# Altium PCB miaow-foc-board.pcbdoc (part 7 of 10)
Units mil, origin at the board's own origin, x right, y up, seen from the top; angles counter-clockwise.
Board outline 2755.91 x 3149.61 mil, 6 copper layers (SIG1, GND2, SIG3, PWR4, GND5, SIG6), stack 60.566 mil thick; 437 components, 392 nets, 2120 pads, 1697 vias.
Unrouted connection lines stored in the file: 1090.
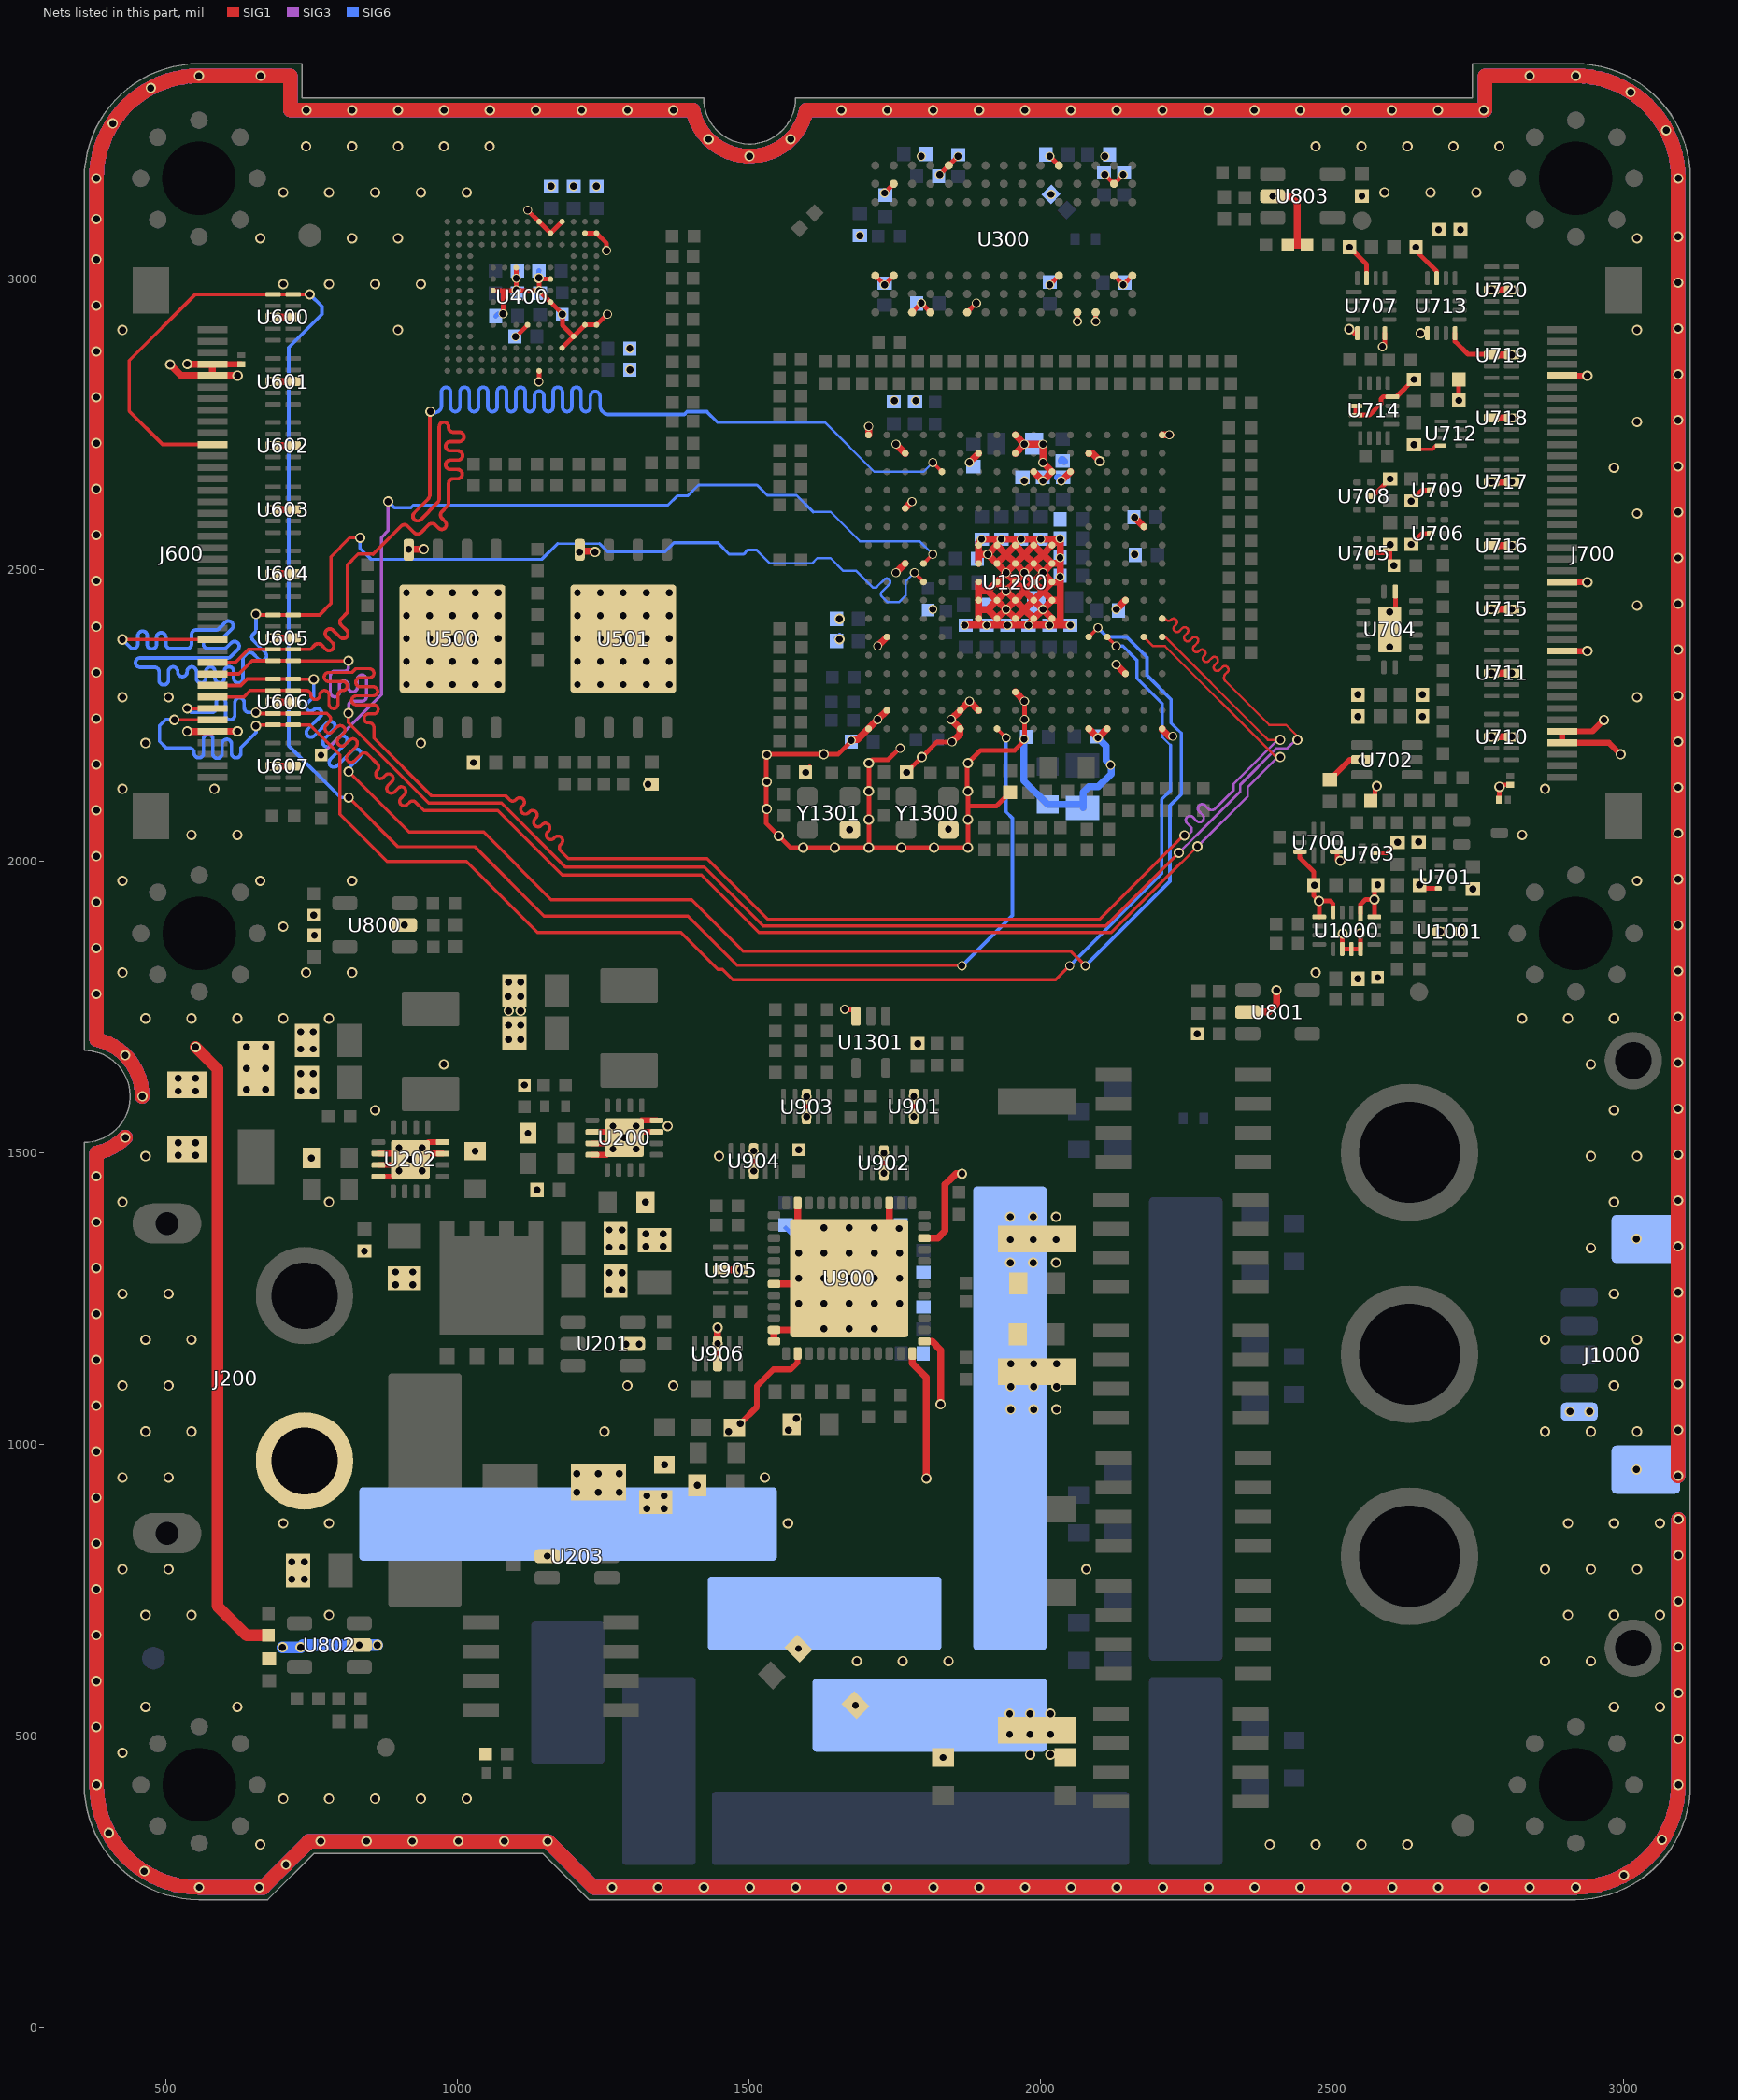
[diagram p10: the nets of this part, all layers, seen from the top]

## Via types
v1: diameter 17.72, hole 11.81, SIG1 to SIG6, tented both sides, 1223 vias
v2: diameter 15.75, hole 11.81, SIG1 to SIG6, tented both sides, 453 vias
v3: diameter 17.72, hole 11.81, SIG1 to SIG6, tented top, 21 vias

## Nets (pads, with @x,y where several pads share a name; then routed paths per layer and width w, separated by ;. In a path a pad name is that pad's centre, name@x,y a point inside that pad or via, vN(x,y) a via of type N, cw(c..) or ccw(c..) an arc to the next point about the centre after c; other vN are vias at no path point) (continued)
GDRVA: C200.1 C201.1 C202.1 C203.1 C204.1 C205.1 C206.1 C210.1 C211.1 C213.1 C214.1 C215.1 C300.1 C301.1 C302.1 C303.1 C304.1 C305.1 C306.1 C307.1 C308.1 C309.1 C310.1 C311.1 C312.1 C313.1 C400.1 C401.1 C402.1 C403.1 C404.1 C405.1 C406.1 C407.1 C408.1 C409.1 C410.1 C500.1 C501.1 C700.2 C701.1 C702.1 C703.2 C704.1 C705.2 C706.1 C707.2 C708.2 C709.2 C710.1 C711.2 C712.1 C713.1 C714.2 C715.1 C716.1 C717.2 C718.2 C719.1 C720.1 C721.2 C802.1 C803.1 C806.1 C807.1 C902.1 C907.2 C1000.1 C1001.2 C1200.1 C1201.1 C1202.1 C1203.1 C1204.1 C1205.1 C1206.1 C1207.1 C1208.1 C1209.1 C1210.1 C1211.1 C1212.1 C1213.1 C1214.1 C1215.1 C1216.1 C1217.1 C1218.1 C1219.1 C1220.1 C1221.1 C1222.1 C1223.1 C1224.1 C1225.1 C1226.1 C1227.1 C1228.1 C1229.1 C1230.1 C1231.1 C1232.1 C1233.1 C1300.2 C1301.2 C1303.2 C1304.2 C1305.2 D201.1 D600.2 D700.1 D701.2 J600.4 J600.5 J600.36 J700.4 J700.5 J700.12 J700.18 J700.36 J1000.5 J1000.PAD R202.2 R203.1 R206.1 R419.1 R712.2 R804.1 R805.1 R806.1 R807.1 R812.1 R813.1 R814.1 R815.1 R905.1 R1385.1 U200.6 U200.7 U200.8 U200.15 U200.16 U200.17 U201.2 U202.6 U202.7 U202.8 U202.15 U202.16 U202.17 U300.A3 U300.B3 U300.B8 U300.C1 U300.D1 U300.E9 U300.F1 U300.L3 U300.L9 U300.M1 U300.N1 U300.P3 U300.P8 U300.R3 U400.A6 U400.C4 U400.D3 U400.E1 U400.E2 U400.E7 U400.G5 U400.H10 U400.J5 U400.K8 U400.N1 U400.N2 U400.N5 U400.P4 U400.P6 U500.4 U500.9 U501.4 U501.9 U600.3 U600.8 U601.3 U601.8 U602.3 U602.8 U603.3 U603.8 U604.3 U604.8 U605.3 U605.8 U606.3 U606.8 U607.3 U607.8 U700.3 U700.10 U701.3 U702.2 U703.2 U704.8 U704.17 U705.2 U706.2 U707.5 U707.8 U707.15 U708.2 U709.2 U710.3 U710.8 U711.3 U711.8 U712.4 U713.5 U713.8 U713.15 U714.4 U714.10 U714.11 U715.3 U715.8 U716.3 U716.8 U717.3 U717.8 U718.3 U718.8 U719.3 U719.8 U720.3 U720.8 U800.2 U801.2 U802.2 U803.2 U900.27 U900.35 U900.43 U900.47 U900.48 U900.49 U901.3 U901.8 U902.3 U902.8 U903.3 U903.8 U904.3 U904.8 U905.3 U905.8 U906.3 U906.8 U1000.1 U1000.4 U1000.5 U1000.10 U1000.11 U1000.12 U1000.16 U1001.3 U1001.8 U1200.A1 U1200.A17 U1200.B2 U1200.B6 U1200.C10 U1200.C13 U1200.C16 U1200.F1 U1200.F2 U1200.G2 U1200.G7 U1200.G8 U1200.G9 U1200.G10 U1200.G11 U1200.G16 U1200.H7 U1200.H8 U1200.H9 U1200.H10 U1200.H11 U1200.J3 U1200.J7 U1200.J8 U1200.J9 U1200.J10 U1200.J11 U1200.J16 U1200.J17 U1200.K7 U1200.K8 U1200.K9 U1200.K10 U1200.K11 U1200.K15 U1200.L7 U1200.L8 U1200.L9 U1200.L10 U1200.L11 U1200.L15 U1200.M15 U1200.N1 U1200.N16 U1200.P1 U1200.R4 U1200.R8 U1200.T12 U1200.U1 U1200.U17 U1301.3 Y1300.2 Y1301.2 | length 31073.7
  SIG1 w6: J600.5@579.13,2833.8 J600.5@579.29,2833.64 ; J600.4@579.13,2853.47 J600.4@579.54,2853.06 ; U703.2@2573.99,2014.11 2594.16,2014.11 v1(2612.96,2032.9) ; C721.2@2641.04,2717.04 2641.04,2712.2 2646.17,2707.06 2672.12,2707.06 2678.56,2713.5 U712.4@2686.6,2713.5
  SIG1 w8: U400.H10@1061.14,2979.62 1078.08,2979.62 ; v2(1078.08,2939.59) 1078.08,2979.62 ; v2@1100.15,2900.51 U400.E7@1120.19,2920.56 ; U400.K8@1100.51,3018.99 1100.51,2980.5 v2(1100.68,2980.33) ; v2(1120.45,3117.57) 1120.45,3117.15 U400.P6@1139.88,3097.73 U400.N5@1159.56,3078.04 U400.P4@1179.25,3097.73 ; v2(1139.35,2823.12) 1139.88,2823.64 U400.A6@1139.88,2841.82 ; U400.J5@1159.56,2999.3 1144.98,2999.3 1141.35,3002.93 1139.55,3002.93 1139.93,3002.55 1139.93,2979.38 v2(1139.86,2979.32) ; U400.C4@1179.25,2881.19 U400.D3@1198.93,2900.87 ; U400.N2@1218.62,3078.04 U400.N1@1238.3,3078.04 1255.65,3060.7 v2(1255.65,3048.1) ; v2(1257.23,2938.88) 1256.62,2938.88 U400.E1@1238.3,2920.56 U400.E2@1218.62,2920.56 U400.D3@1198.93,2900.87 ; v1@1529.68,2085.27 v1@1529.68,2183.78 ; v1@1529.9,2085.27 1529.9,2065.27 v1(1551.01,2044.16) 1571.7,2023.47 v1@1704.23,2023.47 ; v1@1535.34,2183.78 v1(1628.42,2183.78) 1652.69,2183.78 v2@1673.7,2204.79 ; v1(1597.08,2152.88) 1604.5,2160.3 C1304.2@1604.5,2162.19 ; v2(1664.33,1746.51) 1664.33,1745.67 U1301.3@1680.15,1745.67 ; U300.A3@1716.9,3005.21 v2(1732.65,2989.46) U300.B3@1748.4,3005.21 ; v2(1732.65,3146.94) U300.B8@1748.4,3162.69 ; v2@1758.57,2194.39 1738.95,2174.77 1711.52,2174.77 v1(1705.58,2168.83) v1(1705.58,2120.52) v1(1705.58,2072.21) v1(1705.58,2023.91) v1(1761.58,2023.91) v1(1817.59,2023.91) v1@1874.02,2023.91 ; C1303.2@1778.62,2161.09 v1(1796.69,2179.15) 1822.79,2205.25 v2(1848.48,2205.25) ; U300.C1@1779.9,2942.21 v2(1795.64,2957.96) U300.D1@1811.39,2942.21 ; v2(1827.14,3178.43) U300.E9@1842.89,3194.18 v2(1858.64,3209.93) ; v1@1874.02,2121.19 v1@1874.02,2168.83 ; U300.F1@1874.38,2941.92 U300.F1@1874.38,2942.21 v2(1890.13,2957.96) ; v1(1875.6,2023.91) v1(1875.6,2072.21) 1875.6,2095.01 ; v1(1875.6,2120.52) 1875.6,2095.01 ; v1(1875.6,2168.83) 1897.63,2190.86 1955.86,2190.86 v2@1975.02,2210.02 ; C1300.2@1948.14,2118.7 1924.45,2095.01 1875.6,2095.01 ; v2@1972.81,2214.86 v2(1972.81,2243.6) v2(1972.81,2275.1) ; v2(2016.12,2989.46) U300.L3@2031.86,3005.21 ; v2(2016.12,3209.93) U300.L9@2031.86,3194.18 ; v2@2062.53,2924.18 2063.36,2925.01 U300.M1@2063.36,2942.21 ; v2@2094.86,2925.01 U300.N1@2094.86,2942.21 ; v2(2110.6,3178.43) U300.P8@2126.35,3162.69 v2(2142.1,3178.43) ; U300.P3@2126.35,3005.21 v2(2142.1,2989.46) U300.R3@2157.85,3005.21 ; v2@2221.95,2214.93 v2(2227.31,2214.93) ; U700.10@2445.45,2016.87 2445.45,2006.12 2469.36,1982.21 2469.36,1940.93 v1@2478.65,1931.64 ; U1000.5@2478.65,1905.07 v1@2478.65,1931.64 ; U1000.4@2502.28,1912.94 2502.28,1927.41 2497.4,1932.29 2479.31,1932.29 v1@2478.65,1931.64 ; U700.3@2508.45,2016.87 2509.24,2016.87 2509.3,2016.8 2509.3,2002.4 2510.32,2001.37 v1(2514.65,2001.37) ; v1(2518.91,1876.56) 2518.02,1875.67 U1000.10@2518.02,1849.95 U1000.11@2533.77,1849.95 U1000.12@2549.52,1849.95 2549.52,1873.67 2550.46,1874.61 v1(2548.57,1876.51) ; v1(2529.74,2913.28) 2530.58,2914.11 2538.3,2906.39 U707.5@2543.95,2906.39 ; v1(2530.44,3053.93) 2559.7,3024.67 U707.15@2559.7,3000.88 ; U714.10@2541,2781.56 U714.11@2541,2765.81 2557.98,2765.81 2558.07,2765.9 2564.51,2765.9 2584.25,2785.64 2584.25,2787.3 2584.37,2787.41 2584.37,2793.45 2588.22,2797.3 U714.4@2604,2797.3 2611.2,2797.3 C720.1@2642.04,2828.14 ; U1000.1@2549.52,1910.97 2549.52,1926.44 2557.8,1934.72 v1(2573.14,1934.72) ; C700.2@2567.03,2103.81 2574.04,2110.81 2574.04,2126.12 v1(2577.36,2129.44) ; U708.2@2567.26,2628.79 2572.71,2628.79 v1(2600.16,2656.24) ; U705.2@2568.26,2529.33 2600.16,2529.33 ; U1000.16@2573.14,1905.07 v1(2573.14,1934.72) ; v1(2578.95,1959.8) 2573.14,1953.99 v1(2573.14,1934.72) ; v2@2586.27,2883.81 2586.97,2883.11 2591.2,2887.34 U707.8@2591.2,2906.39 ; U704.17@2599.28,2398.25 2609.12,2408.09 U704.8@2609.12,2463.21 ; v1(2600.16,2543.71) 2600.16,2514.17 v1(2606.83,2507.49) ; v1(2636.61,2544.08) 2655.12,2562.59 U706.2@2669.81,2562.59 ; v1(2636.61,2618.44) 2655.29,2637.12 U709.2@2669.81,2637.12 ; C715.1@2637.58,3048.93 C715.1@2645.07,3048.93 ; v1(2644.58,3053.93) 2644.58,3048 2680,3012.58 U713.15@2680,2995.62 ; v1(2650.74,1959.8) 2656.79,1953.75 U701.3@2682.84,1953.75 ; v1(2652.56,2906.32) 2652.63,2906.39 2655.16,2906.39 U713.5@2664.25,2906.39 ; U713.8@2711.49,2906.39 2711.49,2892.39 2733.62,2870.26 U719.8@2774.38,2870.26 ; C717.2@2718.04,2826.98 2718.04,2791.64 C716.1@2718.56,2791.12 ; D701.2@2785.52,2106.15 2787.12,2107.76 2787.12,2127.45 2789.65,2127.45 2793.82,2131.62 D700.1@2806.2,2131.62 ; 1078.08,2979.62 1107.42,2979.62 1108.14,2980.33 1109.15,2979.32 v2(1139.86,2979.32) ; v2(1139.86,2979.32) 1159.25,2959.93 U400.G5@1159.56,2959.93 1179.67,2939.83 1179.67,2920.14 U400.D3@1198.93,2900.87
  SIG1 w10: J600.4@579.54,2853.06 D600.2@628.59,2853.06 ; U202.8@864.06,1459.58 U202.17@889.65,1459.58 ; U202.7@864.06,1479.27 U202.17@888.49,1479.27 ; U202.6@864.06,1498.95 U202.17@888.85,1498.95 ; U202.17@949.84,1518.64 U202.16@974.29,1518.64 ; U202.17@949.91,1498.95 U202.15@974.29,1498.95 ; U200.8@1231.23,1496.8 U200.17@1255.81,1496.8 ; U200.7@1231.23,1516.48 U200.17@1255.59,1516.48 ; U200.6@1231.23,1536.17 U200.17@1255.42,1536.17 ; U200.17@1315.88,1555.85 U200.16@1341.47,1555.85 ; U200.17@1317.19,1536.17 U200.15@1341.47,1536.17 ; C701.1@2496.86,2140.5 2530.74,2174.38 v1(2551.36,2174.38) ; J700.12@2895.49,2361.06 v1(2938.59,2361.05) ; J700.18@2895.49,2479.17 v1(2938.59,2479.16) ; J700.36@2895.49,2833.5 v1(2938.59,2833.49) ; v1(2967.06,2242.94) 2947.53,2223.4 J700.5@2895.33,2223.4 J700.4@2895.33,2203.72 2975.69,2203.72 v1(2995.53,2183.88)
  SIG1 w12: v1(506.91,2852.67) 525.79,2833.78 579.13,2833.78 579.13,2853.47 v1(536.03,2853.48) ; v1(536.03,2223.25) J600.36@579.13,2223.26 ; J600.36@579.29,2223.4 v1(622.45,2223.38) ; J600.5@579.29,2833.64 v1(622.45,2833.62) ; U607.3@683.32,2163.73 U607.8@717.77,2163.73 ; U606.3@683.32,2273.73 U606.8@717.77,2273.73 ; U605.3@683.32,2383.73 U605.8@717.77,2383.73 ; U604.3@683.32,2493.73 U604.8@717.77,2493.73 ; U603.3@683.32,2603.73 U603.8@717.77,2603.73 ; U602.3@683.32,2713.73 U602.8@717.77,2713.73 ; U601.3@683.32,2823.73 U601.8@717.77,2823.73 ; U600.8@683.32,2933.73 U600.3@717.77,2933.73 ; v1(916.36,2535.83) v1(942.18,2535.83) ; U501.4@1209.36,2534.7 U501.4@1209.75,2535.1 ; U501.4@1209.75,2532.1 v1@1235.8,2532.1 ; U906.3@1446.17,1138.7 v1(1446.17,1200.04) ; U905.3@1451.46,1299.53 v1(1485.91,1299.53) ; v1(1508.19,1469.07) v1(1508.19,1503.52) ; U900.48@1543.03,1176.77 U900.47@1543.03,1196.45 U900.49@1575.98,1196.45 ; U900.43@1543.03,1275.19 U900.49@1571.31,1275.19 ; U900.49@1583.39,1373.62 U900.35@1583.39,1413.97 ; v1(1598.68,1562.2) v1(1598.68,1596.65) ; v2@1677.05,2209.3 1686.54,2209.3 U1200.A1@1705.09,2227.85 v2(1720.84,2243.6) U1200.B2@1736.59,2259.35 ; U1200.A17@1705.37,2732.07 v2(1705.36,2746.52) ; v2(1720.84,2369.59) U1200.B6@1736.59,2385.33 ; v1(1731.51,1465.64) v1(1731.51,1500.09) ; U900.49@1740.87,1373.62 U900.27@1740.87,1413.97 ; v2(1752.34,2495.57) U1200.C10@1768.08,2511.32 ; v2(1752.34,2716.04) U1200.C16@1768.08,2700.29 ; v2@1758.57,2194.39 v2(1759.45,2194.39) ; U1200.C13@1768.08,2605.81 1779.63,2617.35 v2(1779.63,2617.57) ; v1(1782.99,1562.69) v1(1782.99,1597.14) ; v2@1848.59,2205.14 1861.84,2218.39 1861.84,2227.12 U1200.F1@1862.57,2227.85 v2(1846.82,2243.6) U1200.F2@1862.57,2259.35 ; U1200.F2@1862.57,2259.52 v2@1878.15,2275.1 ; v2(1869.99,2405.45) 1894.07,2405.45 ; v2(1878.32,2275.1) U1200.G2@1894.07,2259.35 ; v2(1878.32,2684.55) U1200.G16@1894.07,2700.29 ; U1200.G9@1894.07,2479.82 1894.07,2464.44 ; U1200.G10@1894.07,2511.32 1894.07,2527.11 ; 1894.99,2432.58 1909.82,2432.58 ; v2@1898.76,2553.07 v2(1899.07,2553.07) ; 1925.56,2405.6 U1200.H7@1925.56,2416.83 ; v2@1925.56,2552.23 U1200.H11@1925.56,2542.81 ; U1200.J3@1957.06,2290.85 v2(1972.81,2275.1) ; 1957.06,2406.15 U1200.J7@1957.06,2416.83 ; U1200.J16@1957.06,2700.29 v2(1972.81,2716.04) ; U1200.J17@1957.06,2731.79 v2(1972.81,2716.04) ; v2@1980.32,2408.59 U1200.K7@1988.56,2416.83 ; U1200.K15@1988.56,2668.8 v2(2004.3,2653.05) U1200.L15@2020.05,2668.8 v2(2004.3,2684.55) 2004.3,2714.6 2002.86,2716.04 v2(1972.81,2716.04) ; v2@2004.4,2432.58 U1200.L7@2020.05,2416.92 ; U1200.L7@2020.05,2416.83 2031.48,2405.45 v2(2015.67,2405.45) ; v2@2030.3,2553.07 U1200.L11@2020.05,2542.81 2004.3,2527.07 ; 2031.57,2479.82 U1200.L9@2020.05,2479.82 ; 2033.64,2448.33 U1200.L8@2020.05,2448.33 ; 2033.95,2405.72 v2(2033.95,2488.47) 2033.95,2511.41 ; v2(2035.8,2653.05) U1200.M15@2051.55,2668.8 ; v2(2051.59,2405.45) v2(2015.67,2405.45) ; U1200.N1@2083.05,2227.85 v2(2098.79,2212.11) U1200.P1@2114.54,2227.85 ; U1200.N16@2083.05,2700.29 2089.24,2700.29 v1@2101.8,2687.73 ; v2(2130.29,2338.09) U1200.R4@2146.04,2322.34 ; v2(2130.29,2432.58) U1200.R8@2146.04,2448.33 ; v2(2161.79,2590.06) U1200.T12@2177.53,2574.31 ; U1200.U1@2209.03,2227.85 2209.03,2226.6 2220.69,2214.93 v2(2227.31,2214.93) ; U1200.U17@2209.03,2731.79 2223.15,2731.79 v2@2223.32,2731.97 ; U801.2@2355.75,1741.88 2392.07,1741.88 2405.27,1755.08 v1(2405.27,1779.28) ; v1(2398.57,3141.36) 2429.09,3141.36 2441.05,3129.41 2441.05,3057.4 ; R815.1@2424.74,3057.4 2441.05,3057.4 ; R813.1@2457.36,3057.4 2441.05,3057.4 ; C803.1@2539.69,1798.55 C803.1@2539.96,1798.28 ; v2(2774.38,2213.98) v2(2808.83,2213.98) ; v2(2774.38,2323.36) v2(2808.83,2323.36) ; v2(2774.38,2432.74) v2(2808.83,2432.74) ; U716.8@2774.38,2542.12 v2(2808.83,2542.12) ; v2(2774.38,2651.5) v2(2808.83,2651.5) ; U718.8@2774.38,2760.88 v2(2808.83,2760.88) ; U719.8@2774.38,2869.26 v2(2808.83,2869.26) ; v2(2774.38,2980.64) v2(2808.83,2980.64) ; 1894.07,2405.45 v2(1907.91,2405.45) v2(1943.83,2405.45) v2(1979.75,2405.45) v2(2015.67,2405.45) ; 1894.07,2405.45 U1200.G7@1894.07,2416.83 U1200.G8@1894.07,2448.33 1894.07,2464.44 ; 1894.07,2464.44 1894.43,2464.07 1909.82,2464.07 ; 1894.07,2527.11 U1200.G11@1894.07,2542.81 1894.07,2548.06 v2(1899.07,2553.07) ; 1894.07,2527.11 1894.11,2527.07 v2(1909.82,2527.07) ; v2(1899.07,2553.07) v2(1932.93,2553.07) 1957.18,2553.07 ; 1909.82,2432.58 U1200.H7@1925.56,2416.83 ; 1909.82,2432.58 U1200.H8@1925.56,2448.33 ; 1909.82,2464.07 U1200.H8@1925.56,2448.33 ; 1909.82,2464.07 U1200.H9@1925.56,2479.82 ; v2(1909.82,2527.07) U1200.H10@1925.56,2511.32 ; v2(1909.82,2527.07) U1200.H11@1925.56,2542.81 ; U1200.H7@1925.56,2416.83 v2(1941.31,2432.58) ; U1200.H8@1925.56,2448.33 v2(1941.31,2464.07) ; U1200.H8@1925.56,2448.33 v2(1941.31,2432.58) ; U1200.H9@1925.56,2479.82 v2(1941.31,2495.57) ; U1200.H9@1925.56,2479.82 v2(1941.31,2464.07) ; U1200.H10@1925.56,2511.32 1941.31,2527.07 ; U1200.H10@1925.56,2511.32 v2(1941.31,2495.57) ; U1200.H11@1925.56,2542.81 1941.31,2527.07 ; v2(1941.31,2432.58) U1200.J8@1957.06,2448.33 ; v2(1941.31,2432.58) U1200.J7@1957.06,2416.83 ; v2(1941.31,2464.07) U1200.J8@1957.06,2448.33 ; v2(1941.31,2464.07) U1200.J9@1957.06,2479.82 ; v2(1941.31,2495.57) U1200.J10@1957.06,2511.32 ; v2(1941.31,2495.57) U1200.J9@1957.06,2479.82 ; 1941.31,2527.07 U1200.J11@1957.06,2542.81 ; 1941.31,2527.07 U1200.J10@1957.06,2511.32 ; U1200.J7@1957.06,2416.83 1972.81,2432.58 ; U1200.J8@1957.06,2448.33 1972.81,2432.58 ; U1200.J8@1957.06,2448.33 1972.81,2464.07 ; U1200.J9@1957.06,2479.82 1972.81,2464.07 ; U1200.J9@1957.06,2479.82 v2(1972.81,2495.57) ; U1200.J10@1957.06,2511.32 1972.81,2527.07 ; U1200.J10@1957.06,2511.32 v2(1972.81,2495.57) ; U1200.J11@1957.06,2542.81 1957.06,2552.94 1957.18,2553.07 ; U1200.J11@1957.06,2542.81 1972.81,2527.07 ; 1957.18,2553.07 v2(1966.78,2553.07) 1988.48,2553.07 ; 1972.81,2432.58 U1200.K8@1988.56,2448.33 ; 1972.81,2432.58 U1200.K7@1988.56,2416.83 ; 1972.81,2464.07 U1200.K8@1988.56,2448.33 ; 1972.81,2464.07 U1200.K9@1988.56,2479.82 ; v2(1972.81,2495.57) U1200.K9@1988.56,2479.82 ; v2(1972.81,2495.57) U1200.K10@1988.56,2511.32 ; 1972.81,2527.07 U1200.K11@1988.56,2542.81 ; 1972.81,2527.07 U1200.K10@1988.56,2511.32 ; 1988.48,2553.07 v2(2000.64,2553.07) 2032.88,2553.07 v2(2033.95,2554.13) v2(2033.95,2521.3) 2033.95,2511.41 ; 1988.48,2553.07 1988.56,2552.99 U1200.K11@1988.56,2542.81 ; U1200.K7@1988.56,2416.83 v2(2004.31,2432.58) ; U1200.K8@1988.56,2448.33 v2(2004.31,2432.58) ; U1200.K8@1988.56,2448.33 2004.3,2464.07 ; U1200.K9@1988.56,2479.82 2004.3,2464.07 ; U1200.K9@1988.56,2479.82 v2(2004.3,2495.57) ; U1200.K10@1988.56,2511.32 v2(2004.3,2495.57) ; U1200.K10@1988.56,2511.32 2004.3,2527.07 ; U1200.K11@1988.56,2542.81 2004.3,2527.07 ; v2(2004.31,2432.58) U1200.L8@2020.05,2448.33 ; 2004.3,2464.07 U1200.L9@2020.05,2479.82 ; 2004.3,2464.07 U1200.L8@2020.05,2448.33 ; v2(2004.3,2495.57) U1200.L9@2020.05,2479.82 ; v2(2004.3,2495.57) U1200.L10@2020.05,2511.32 ; 2004.3,2527.07 U1200.L10@2020.05,2511.32 ; U1200.L10@2020.05,2511.32 2020.15,2511.41 2033.95,2511.41
  SIG1 w20: v1(550.43,1681.65) 587.9,1644.19 587.9,722.71 638.39,672.21 R812.1@674.99,672.21
  SIG1 w25: v1@458.87,1596.97 ccw(c359.36,1597.13) 380.27,1694.42 380.21,1694.48 v1(380.21,1772.92) v1(380.21,1851.66) v1(380.21,1930.4) v1(380.21,2009.14) v1(380.21,2087.88) v1(380.21,2166.62) v1(380.21,2245.36) v1(380.21,2324.1) v1(380.21,2402.84) v1(380.21,2481.58) v1(380.21,2560.32) v1(380.21,2639.06) v1(380.21,2717.8) v1(380.21,2796.54) v1(380.21,2875.28) v1(380.21,2954.02) v1(380.21,3032.76) v1(380.21,3102.29) v1(380.21,3171.94) cw(c556.21,3171.94) v1(556.21,3347.94) v1(661.96,3347.93) 713,3347.93 713,3288.96 v1(740.39,3288.96) v1(819.13,3288.96) v1(897.87,3288.96) v1(976.61,3288.96) v1(1055.35,3288.96) v1(1134.09,3288.96) v1(1212.83,3288.96) v1(1291.57,3288.96) v1(1370.31,3288.96) 1403.66,3288.96 1403.8,3288.82 ccw(c1501.09,3309.73) 1598.43,3289.06 ; 1598.27,3288.34 1598.89,3288.96 v1(1658.5,3288.96) v1(2682.12,3288.96) v1(2760.86,3288.96) 2762.86,3288.96 2762.86,3347.93 v1(2918.65,3347.93) cw(c2918.65,3171.93) v1(3094.65,3171.93) ; v1(3094.21,946.02) v1(3094.21,1024.76) v1(3094.21,1103.5) v1(3094.21,1182.24) v1(3094.21,1260.98) v1(3094.21,1339.72) v1(3094.21,1418.46) v1(3094.21,1497.2) v1(3094.21,1575.94) v1(3094.21,1654.68) v1(3094.21,1733.42) v1(3094.21,1812.16) v1(3094.21,1890.9) v1(3094.21,1969.64) v1(3094.21,2048.38) v1(3094.21,2127.12) v1(3094.21,2205.86) v1(3094.21,2284.6) v1(3094.21,2363.35) v1(3094.21,2442.09) v1(3094.21,2520.83) v1(3094.21,2599.57) v1(3094.21,2678.31) v1(3094.21,2757.05) v1(3094.21,2835.79) v1(3094.21,2914.53) v1(3094.21,2993.27) v1(3094.21,3072.01) v1@3094.21,3171.93
  SIG3 w25: v1@458.87,1596.97 ccw(c359.36,1597.13) 380.27,1694.42 380.21,1694.48 v1(380.21,1772.92) v1(380.21,1851.66) v1(380.21,1930.4) v1(380.21,2009.14) v1(380.21,2087.88) v1(380.21,2166.62) v1(380.21,2245.36) v1(380.21,2324.1) v1(380.21,2402.84) v1(380.21,2481.58) v1(380.21,2560.32) v1(380.21,2639.06) v1(380.21,2717.8) v1(380.21,2796.54) v1(380.21,2875.28) v1(380.21,2954.02) v1(380.21,3032.76) v1(380.21,3102.29) v1(380.21,3171.94) cw(c556.21,3171.94) v1(556.21,3347.94) v1(661.96,3347.93) 713,3347.93 713,3288.96 v1(740.39,3288.96) v1(819.13,3288.96) v1(897.87,3288.96) v1(976.61,3288.96) v1(1055.35,3288.96) v1(1134.09,3288.96) v1(1212.83,3288.96) v1(1291.57,3288.96) v1(1370.31,3288.96) 1403.66,3288.96 1403.8,3288.82 ccw(c1501.09,3309.73) 1598.43,3289.06 ; 1598.27,3288.34 1598.89,3288.96 v1(1658.5,3288.96) v1(2682.12,3288.96) v1(2760.86,3288.96) 2762.86,3288.96 2762.86,3347.93 v1(2918.65,3347.93) cw(c2918.65,3171.93) v1(3094.65,3171.93) ; v1(3094.21,946.02) v1(3094.21,1024.76) v1(3094.21,1103.5) v1(3094.21,1182.24) v1(3094.21,1260.98) v1(3094.21,1339.72) v1(3094.21,1418.46) v1(3094.21,1497.2) v1(3094.21,1575.94) v1(3094.21,1654.68) v1(3094.21,1733.42) v1(3094.21,1812.16) v1(3094.21,1890.9) v1(3094.21,1969.64) v1(3094.21,2048.38) v1(3094.21,2127.12) v1(3094.21,2205.86) v1(3094.21,2284.6) v1(3094.21,2363.35) v1(3094.21,2442.09) v1(3094.21,2520.83) v1(3094.21,2599.57) v1(3094.21,2678.31) v1(3094.21,2757.05) v1(3094.21,2835.79) v1(3094.21,2914.53) v1(3094.21,2993.27) v1(3094.21,3072.01) v1@3094.21,3171.93
  SIG6 w8: C405.1@1065.22,2935.59 1069.22,2939.59 v2(1078.08,2939.59) ; v2(1100.68,3000.68) 1100.68,3011.74 C402.1@1102.68,3013.74 ; v1(1139.51,3001.27) 1139.51,3013.57 C408.1@1139.69,3013.74 ; C902.1@1562.92,1371.4 1585.35,1348.97 v3(1585.35,1328.34) ; C1226.1@1650.11,2383.38 C1226.1@1655.11,2388.38 ; C1205.1@2032.88,2553.07 v2(2033.95,2554.13)
  SIG6 w12: v2(1972.02,2210.02) 1972.02,2138.45 C1230.1@2012.53,2097.94 C1232.1@2065.59,2097.94 ; C1214.1@2029.69,2659.16 cw(c2029.69,2653.05) v2(2035.8,2653.05) ; C1206.1@2035.8,2687.12 cw(c2038.42,2687.12) 2038.42,2689.74 ccw(c2041.47,2689.74) C1206.1@2041.47,2686.69 ; C1232.1@2073.39,2092.14 2073.39,2118.72 2083.03,2128.37 2099.4,2128.37 2121.29,2150.26 v2@2121.29,2164.38 ; v2(2098.79,2212.11) 2112.64,2198.26 2112.64,2173.43 v2@2121.49,2164.58
  SIG6 w20: v1(699.62,651.91) v1(730.7,651.91) 734.47,655.68 v1(831.27,655.68) v1(862.36,655.68)
  SIG6 w25: v1@458.87,1596.97 ccw(c359.36,1597.13) 380.27,1694.42 380.21,1694.48 v1(380.21,1772.92) v1(380.21,1851.66) v1(380.21,1930.4) v1(380.21,2009.14) v1(380.21,2087.88) v1(380.21,2166.62) v1(380.21,2245.36) v1(380.21,2324.1) v1(380.21,2402.84) v1(380.21,2481.58) v1(380.21,2560.32) v1(380.21,2639.06) v1(380.21,2717.8) v1(380.21,2796.54) v1(380.21,2875.28) v1(380.21,2954.02) v1(380.21,3032.76) v1(380.21,3102.29) v1(380.21,3171.94) cw(c556.21,3171.94) v1(556.21,3347.94) v1(661.96,3347.93) 713,3347.93 713,3288.96 v1(740.39,3288.96) v1(819.13,3288.96) v1(897.87,3288.96) v1(976.61,3288.96) v1(1055.35,3288.96) v1(1134.09,3288.96) v1(1212.83,3288.96) v1(1291.57,3288.96) v1(1370.31,3288.96) 1403.66,3288.96 1403.8,3288.82 ccw(c1501.09,3309.73) 1598.43,3289.06 ; 1598.27,3288.34 1598.89,3288.96 v1(1658.5,3288.96) 2762.86,3288.96 2762.86,3347.93 v1(2839.91,3347.93) v1(2918.65,3347.93) cw(c2918.65,3171.93) v1(3094.65,3171.93) ; v1(3094.21,946.02) v1(3094.21,1024.76) v1(3094.21,1103.5) v1(3094.21,1182.24) v1(3094.21,1260.98) v1(3094.21,1339.72) v1(3094.21,1418.46) v1(3094.21,1497.2) v1(3094.21,1575.94) v1(3094.21,1654.68) v1(3094.21,1733.42) v1(3094.21,1812.16) v1(3094.21,1890.9) v1(3094.21,1969.64) v1(3094.21,2048.38) v1(3094.21,2127.12) v1(3094.21,2205.86) v1(3094.21,2284.6) v1(3094.21,2363.35) v1(3094.21,2442.09) v1(3094.21,2520.83) v1(3094.21,2599.57) v1(3094.21,2678.31) v1(3094.21,2757.05) v1(3094.21,2835.79) v1(3094.21,2914.53) v1(3094.21,2993.27) v1(3094.21,3072.01) v1@3094.21,3171.93
  other v1: 3022.84,956.92 2866.11,1022.09 2944.85,1022.09 3023.59,1022.09 2908.67,1056.27 2942.37,1056.27 2984.22,1100.83 1289.07,1171.89 1311.52,1171.89 1446.17,1173.15 2866.11,1179.57 3023.59,1179.57 2984.22,1258.31 1260.29,1265.14 1282.07,1265.14 893.69,1273.97 923.35,1273.97 1260.29,1294.8 1282.07,1294.8 893.69,1295.75 923.35,1295.75 840.08,1331.74 2944.85,1337.05 1260.26,1338.38 1282.04,1338.38 1323.19,1339.55 1352.86,1339.55 3022.84,1352.46 1323.19,1361.33 1352.86,1361.33 1260.26,1368.05 1282.04,1368.05 1757.96,1370.4 779.5,1415.79 1322.28,1415.95 2984.22,1415.79 1136.55,1436.42 899.49,1469.42 938.86,1469.42 919.18,1489.11 749.15,1491.29 1448.79,1494.53 2944.85,1494.53 3023.59,1494.53 1030.08,1503.06 1585.51,1505.68 1266.67,1506.64 1306.04,1506.64 899.49,1508.79 938.86,1508.79 1286.35,1526.32 1120.67,1533.94 1266.67,1546.01 1306.04,1546.01 1360.56,1545.96 858.24,1573.27 2984.22,1573.27 459.03,1596.97 520.77,1606.18 550.43,1606.18 730.53,1606.36 752.31,1606.36 637.78,1608.63 670.28,1608.63 1114.44,1616.53 520.77,1627.97 550.43,1627.97 730.53,1636.02 752.31,1636.02 637.78,1645.14 670.28,1645.14 976.35,1652.01 2944.85,1652.01 429.72,1667.5 730.53,1678.24 752.31,1678.24 637.78,1681.65 670.28,1681.65 1789.45,1687.4 1087.5,1694.5 1108.29,1694.5 2269.42,1704.28 730.53,1707.91 752.31,1707.91 1087.5,1719.16 1108.29,1719.16 464.54,1730.75 543.28,1730.75 622.02,1730.75 700.76,1730.75 779.5,1730.75 2826.74,1730.75 2905.48,1730.75 2984.22,1730.75 1087.5,1743.82 1108.29,1743.82 1086.5,1768.48 1108.29,1768.48 1087.5,1793.15 1108.29,1793.15 2544.76,1799.04 2578.91,1800.93 425.17,1809.49 740.13,1809.49 818.87,1809.49 2472.41,1809.49 754.25,1873.66 2685.88,1879.67 2720.33,1879.67 700.76,1888.23 908.85,1891 752.87,1907.7 2478.33,1932.13 2742.32,1953.02 2470.36,1959.3 425.17,1966.97 661.39,1966.97 818.87,1966.97 3023.59,1966.97 1592.9,2023.91 1647.27,2023.91 2649.18,2033.74 543.28,2045.71 622.02,2045.71 2826.74,2045.71 1672.96,2054.86 1842.31,2055.21 1530.68,2090.2 425.17,2124.45 582.65,2124.45 2866.11,2124.45 2787.81,2128.24 1326.69,2132.63 1530.68,2136.74 1770.33,2152.88 1027.5,2169.79 1530.68,2183.28 464.54,2203.19 936.98,2203.19 2545.06,2248.68 2655.68,2248.68 425.17,2281.93 503.91,2281.93 3023.59,2281.93 2545.06,2286.16 2655.68,2286.16 912.36,2303.6 951.73,2303.6 991.1,2303.6 1030.47,2303.6 1069.84,2303.6 1205.62,2303.6 1244.99,2303.6 1284.36,2303.6 1323.73,2303.6 1363.1,2303.6 912.36,2342.97 951.73,2342.97 991.1,2342.97 1030.47,2342.97 1069.84,2342.97 1205.62,2342.97 1244.99,2342.97 1284.36,2342.97 1323.73,2342.97 1363.1,2342.97 2599.28,2368.25 1655.11,2381.38 912.36,2382.34 951.73,2382.34 991.1,2382.34 1030.47,2382.34 1069.84,2382.34 1205.62,2382.34 1244.99,2382.34 1284.36,2382.34 1323.73,2382.34 1363.1,2382.34 1655.11,2416.23 912.36,2421.71 951.73,2421.71 991.1,2421.71 1030.47,2421.71 1069.84,2421.71 1205.62,2421.71 1244.99,2421.71 1284.36,2421.71 1323.73,2421.71 1363.1,2421.71 2599.28,2428.25 3023.59,2439.41 912.36,2461.08 951.73,2461.08 991.1,2461.08 1030.47,2461.08 1069.84,2461.08 1205.62,2461.08 1244.99,2461.08 1284.36,2461.08 1323.73,2461.08 1363.1,2461.08 1209.36,2530.7 1235.8,2531.1 3023.59,2596.89 2984.22,2675.63 2101.8,2686.69 2641.04,2715.04 3023.59,2754.37 425.17,2911.85 897.61,2911.85 3023.59,2911.85 700.76,2990.6 779.5,2990.6 858.24,2990.6 936.98,2990.6 661.39,3069.34 818.87,3069.34 897.61,3069.34 3023.59,3069.34 2551.82,3141.63 700.76,3148.08 779.5,3148.08 858.24,3148.08 936.98,3148.08 1015.72,3148.08 2590.52,3148.08 2669.26,3148.08 2748,3148.08 1500.93,3210.06 740.13,3226.82 818.87,3226.82 897.61,3226.82 976.35,3226.82 1055.09,3226.82 2472.41,3226.82 2551.15,3226.82 2629.89,3226.82 2708.63,3226.82 2787.37,3226.82 1430.57,3239.21 1571.45,3239.37 3073.76,3254.53 408.13,3266.12 1737.24,3288.96 1815.98,3288.96 1894.72,3288.96 1973.46,3288.96 2052.2,3288.96 2130.94,3288.96 2209.68,3288.96 2288.42,3288.96 2367.16,3288.96 2445.9,3288.96 2524.64,3288.96 2603.38,3288.96 3012.83,3320.01 473.61,3327.05
  other v2: 678.82,2163.73 2120.39,2165.48 1675.57,2207.82 678.82,2273.73 678.82,2383.73 1815.33,2432.58 678.82,2493.73 2161.79,2527.07 678.82,2603.73 1972.81,2653.05 678.82,2713.73 2004.3,2716.04 2221.32,2731.97 1749.46,2790.76 1786.14,2790.76 2718.04,2790.98 678.82,2823.73 2641.04,2827.14 1295.64,2843.72 1295.44,2880.19 2586.91,2883.42 1099.38,2900.51 2063.53,2926.47 2095.02,2926.47 678.82,2933.73 1179.67,2938.74 1690.32,3073.87 2683.31,3083.94 2720.85,3083.94 2018.5,3144.55 1160.59,3158.34 1198.91,3158.34 1238.21,3158.34 1795.64,3209.93 2110.6,3209.93
  other v3: 1628.66,1198.42 1671.97,1198.42 1715.28,1198.42 1585.35,1241.73 1628.66,1241.73 1671.97,1241.73 1715.28,1241.73 1758.58,1241.73 1585.35,1285.04 1628.66,1285.04 1671.97,1285.04 1715.28,1285.04 1758.58,1285.04 1628.66,1328.34 1671.97,1328.34 1715.28,1328.34 1758.58,1328.34 1628.66,1371.65 1671.97,1371.65 1715.28,1371.65
GDRVP: BAR1401.1 BAR1403.1 BAR1405.1 BAR1407.1 C208.1 C209.1 C216.1 C217.1 C218.1 C219.1 C900.1 C901.1 C904.1 C906.1 C908.2 C909.1 C910.1 C911.1 D200.1 J200.1 R202.1 R918.1 R923.1 R926.1 R927.1 U203.2 U900.2 U900.12 U900.13 U900.22 | length 14419
  SIG1 w10: v1(1484.99,1035.6) 1513.51,1064.13 1513.51,1100.17 1541.89,1128.55 1571.36,1128.55 1583.39,1140.57 U900.2@1583.39,1156.1
  SIG1 w12: U900.12@1780.24,1156.1 1780.24,1138.86 1804.33,1114.76 1804.33,942.34 1803.97,941.98 v1(1804.25,941.7) ; U900.13@1800.91,1176.77 1814.3,1176.77 1829.16,1161.91 1829.16,1068.78 v1(1828.73,1068.78) ; U900.22@1800.91,1353.93 1823.93,1353.93 1836.6,1366.6 1836.6,1445.94 1848.18,1457.53 1848.57,1457.53 1855.44,1464.39 v1(1865.46,1464.39)
  SIG1 w25: 380.21,1499.84 v1(380.21,1460.15) v1(380.21,1381.41) v1(380.21,1302.67) v1(380.21,1223.93) v1(380.21,1145.19) v1(380.21,1066.45) v1(380.21,987.71) v1(380.21,908.97) v1(380.21,830.23) v1(380.21,751.49) v1(380.21,672.75) v1(380.21,594.01) v1(380.21,515.27) 380.21,416.03 v1(380.44,416.03) ccw(c556.44,416.03) v1(556.44,240.03) v1(659.48,240.03) 666.36,240.03 v1(705.49,279.16) 744.62,318.29 ; 380.27,1499.84 ccw(c359.36,1597.13) v1@429.72,1526.77 ; 744.62,319.29 v1(765,319.29) v1(843.74,319.29) v1(922.48,319.29) v1(1001.22,319.29) v1(1079.96,319.29) v1(1154.7,319.29) 1233.96,240.03 v1(1265.1,240.03) v1(1343.84,240.03) v1(1422.58,240.03) v1(1501.32,240.03) v1(1580.06,240.03) v1(1658.8,240.03) v1(1737.54,240.03) v1(1816.28,240.03) v1(1895.02,240.03) v1(1973.76,240.03) v1(2052.51,240.03) v1(2131.25,240.03) v1(2209.99,240.03) v1(2288.73,240.03) v1(2367.47,240.03) v1(2446.21,240.03) v1(2524.95,240.03) v1(2603.69,240.03) v1(2682.43,240.03) v1(2761.17,240.03) v1(2839.91,240.03) v1(2918.65,240.03) ccw(c2918.65,416.03) v1(3094.65,416.03) v1(3094.65,494.77) v1(3094.65,573.51) v1(3094.65,652.25) v1(3094.65,730.99) v1(3094.65,809.73) 3094.89,809.97 v1(3094.89,871.45)
  SIG3 w25: 380.21,1499.84 v1(380.21,1460.15) v1(380.21,1381.41) v1(380.21,1302.67) v1(380.21,1223.93) v1(380.21,1145.19) v1(380.21,1066.45) v1(380.21,987.71) v1(380.21,908.97) v1(380.21,830.23) v1(380.21,751.49) v1(380.21,672.75) v1(380.21,594.01) v1(380.21,515.27) 380.21,416.03 v1(380.44,416.03) ccw(c556.44,416.03) v1(556.44,240.03) v1(659.48,240.03) 666.36,240.03 v1(705.49,279.16) 744.62,318.29 ; 380.27,1499.84 ccw(c359.36,1597.13) v1@429.72,1526.77 ; 744.62,319.29 v1(765,319.29) v1(843.74,319.29) v1(922.48,319.29) v1(1001.22,319.29) v1(1079.96,319.29) v1(1154.7,319.29) 1233.96,240.03 v1(1265.1,240.03) v1(1343.84,240.03) v1(1422.58,240.03) v1(1501.32,240.03) v1(1580.06,240.03) v1(1658.8,240.03) v1(1737.54,240.03) v1(1816.28,240.03) v1(1895.02,240.03) v1(1973.76,240.03) v1(2052.51,240.03) v1(2131.25,240.03) v1(2209.99,240.03) v1(2288.73,240.03) v1(2367.47,240.03) v1(2446.21,240.03) v1(2524.95,240.03) v1(2603.69,240.03) v1(2682.43,240.03) v1(2761.17,240.03) v1(2839.91,240.03) v1(2918.65,240.03) ccw(c2918.65,416.03) v1(3094.65,416.03) v1(3094.65,494.77) v1(3094.65,573.51) v1(3094.65,652.25) v1(3094.65,730.99) v1(3094.65,809.73) 3094.89,809.97 v1(3094.89,871.45)
  SIG6 w25: 380.21,1499.84 v1(380.21,1460.15) v1(380.21,1381.41) v1(380.21,1302.67) v1(380.21,1223.93) v1(380.21,1145.19) v1(380.21,1066.45) v1(380.21,987.71) v1(380.21,908.97) v1(380.21,830.23) v1(380.21,751.49) v1(380.21,672.75) v1(380.21,594.01) v1(380.21,515.27) 380.21,416.03 v1(380.44,416.03) ccw(c556.44,416.03) v1(556.44,240.03) v1(659.48,240.03) 666.36,240.03 v1(705.49,279.16) 744.62,318.29 ; 380.27,1499.84 ccw(c359.36,1597.13) v1@429.72,1526.77 ; 744.62,319.29 v1(765,319.29) v1(843.74,319.29) v1(922.48,319.29) v1(1001.22,319.29) v1(1079.96,319.29) v1(1154.7,319.29) 1233.96,240.03 v1(1265.1,240.03) v1(1343.84,240.03) v1(1422.58,240.03) v1(1501.32,240.03) v1(1580.06,240.03) v1(1658.8,240.03) v1(1737.54,240.03) v1(1816.28,240.03) v1(1895.02,240.03) v1(1973.76,240.03) v1(2052.51,240.03) v1(2131.25,240.03) v1(2209.99,240.03) v1(2288.73,240.03) v1(2367.47,240.03) v1(2446.21,240.03) v1(2524.95,240.03) v1(2603.69,240.03) v1(2682.43,240.03) v1(2761.17,240.03) v1(2839.91,240.03) v1(2918.65,240.03) ccw(c2918.65,416.03) v1(3094.65,416.03) v1(3094.65,494.77) v1(3094.65,573.51) v1(3094.65,652.25) v1(3094.65,730.99) v1(3094.65,809.73) 3094.89,809.97 v1(3094.89,871.45)
  other v1: 3001.24,260.92 462.26,267.95 661.39,313.43 2393.67,313.43 2472.41,313.43 2551.15,313.43 2629.89,313.43 3066.72,321.85 401.33,333.43 700.76,392.17 779.5,392.17 858.24,392.17 936.98,392.17 1015.72,392.17 1832.93,462.84 1982.35,467.84 2017.35,467.84 425.17,470.91 1947.35,502.84 1982.35,502.84 2017.35,502.84 1947.35,537.84 1982.35,537.84 2017.35,537.84 464.54,549.65 622.02,549.65 2984.22,549.65 3062.96,549.65 1682.79,552.53 1685.01,628.39 1763.75,628.39 1842.49,628.39 2866.11,628.39 2944.85,628.39 1584.96,649.64 464.54,707.13 543.28,707.13 779.5,707.13 2905.48,707.13 2984.22,707.13 3062.96,707.13 715.56,768.66 737.34,768.66 425.17,785.87 503.91,785.87 2078.71,785.87 2866.11,785.87 2944.85,785.87 3023.59,785.87 715.56,798.32 737.34,798.32 1153.91,808.38 700.76,864.61 779.5,864.61 1566.9,864.61 2905.48,864.61 2984.22,864.61 3062.96,864.61 1324.96,889.98 1354.62,889.98 1324.96,911.76 1354.62,911.76 1204.71,917.63 1241.22,917.63 1277.73,917.63 1411.42,929.77 425.17,943.35 503.91,943.35 1527.53,943.35 1204.71,950.13 1241.22,950.13 1277.73,950.13 1355.07,965.41 464.54,1022.09 543.28,1022.09 1251.94,1022.09 1465.3,1021.82 1567.42,1024.65 1581.2,1044.33 1949.02,1059.87 1988.39,1059.87 2027.76,1059.87 1949.02,1099.24 1988.39,1099.24 2027.76,1099.24 425.17,1100.83 503.91,1100.83 1291.31,1100.83 1370.05,1100.83 1949.02,1138.61 1988.39,1138.61 2027.76,1138.61 464.54,1179.57 543.28,1179.57 425.17,1258.31 503.91,1258.31 1948.2,1311.76 1987.57,1311.76 2026.94,1311.76 1948.2,1351.13 1987.57,1351.13 2026.94,1351.13 1948.2,1390.5 1987.57,1390.5 2026.94,1390.5 425.17,1415.79 464.54,1494.53 520.77,1495.95 550.43,1495.95 520.77,1517.73 550.43,1517.73 429.88,1526.61
HSYNC: J600.11 U600.5 U600.6 U1200.H1 | length 3181.7
  SIG1 w5.5: v1(813.16,2109.9) 897.7,2025.36 1029.46,2025.36 1148.46,1906.36 1395.18,1906.36 1479.32,1822.22 1864.24,1822.22 v2(1865.36,1821.1)
  SIG1 w6: J600.11@579.29,2715.53 493.75,2715.53 436.49,2772.79 436.49,2859.72 549.87,2973.1 U600.6@683.32,2973.1 U600.5@717.77,2973.1 ; U600.5@717.88,2972.99 v1(746.42,2972.99) ; U1200.H1@1925.56,2227.85 v2(1941.31,2212.11)
  SIG6 w6: v1(746.42,2972.99) 767,2952.41 767,2938.77 710.13,2881.91 710.13,2198.78 799.02,2109.9 v1(813.16,2109.9) ; v2(1865.36,1821.1) 1951.94,1907.68 1951.94,2074.38 1941.31,2085.01 v2(1941.31,2212.11)
LCD_INT: R600.2 U1200.D10 | length 1509.2
  SIG1 w6: U1200.D10@1799.58,2511.32 v2(1815.33,2527.07)
  SIG3 w5.5: v1(765.64,2182.61) 869.44,2286.41 869.44,2556.02 880.86,2567.44 v1(880.86,2617.73)
  SIG6 w4: 1610.16,2599.78 1640.22,2599.78 1690.31,2549.69 1792.71,2549.69 v2(1815.33,2527.07)
  SIG6 w5: 923.83,2611.37 1361.08,2611.37 1377,2627.29 1394.73,2627.29 1413.29,2645.85 1513.76,2645.85 1531.45,2628.15 1581.79,2628.15 1610.16,2599.78
  SIG6 w5.5: v1(880.86,2617.73) 891.46,2607.14 919.6,2607.14 923.83,2611.37
LCD_R0: J600.28 U605.1 U605.10 U1200.D9 | length 2793.4
  SIG1 w5.5: 782.58,2442.56 782.58,2523.16 815.05,2555.64 v1(832.63,2555.64)
  SIG1 w6: v1(424.77,2380.92) J600.28@577.76,2380.92 ; v1@648.83,2423.1 U605.1@683.32,2423.1 U605.10@717.77,2423.1 763.11,2423.1 782.58,2442.56 ; v2(1783.83,2495.57) U1200.D9@1799.58,2479.82
  SIG6 w4: 1171.66,2544.84 1171.66,2545.56 1243.61,2545.56 ; 1512.78,2534.7 1536.08,2511.4 1608.1,2511.4 1617.13,2520.43 1640,2520.43 1661.89,2498.54 1684.15,2498.54 1710.97,2471.72 ; 1711.22,2471.47 ccw(c1715.46,2475.71) 1719.71,2471.47 1732.12,2483.88 cw(c1736.36,2479.64) 1740.6,2475.39 1728.19,2462.98 ccw(c1732.43,2458.74) 1728.19,2454.5 1737.92,2444.77 1757.09,2444.77 1768.58,2456.26 1768.58,2480.32 v2(1783.83,2495.57)
  SIG6 w5: 1243.61,2545.56 1257.48,2531.69 ; 1446.36,2546.96 1466.34,2526.98 1490.43,2526.98 1498.15,2534.7 1512.78,2534.7
  SIG6 w5.5: v1(832.63,2555.64) 832.63,2537.59 851.82,2518.4 1144.5,2518.4 1171.3,2545.2 1171.66,2544.84 ; 1257.48,2531.69 1355.98,2531.69 1371.25,2546.96 1446.36,2546.96
  SIG6 w6: v1(424.77,2380.92) 440.37,2365.31 443.37,2365.31 ccw(c443.37,2373.31) 451.37,2373.31 451.37,2387.3 cw(c459.37,2387.3) 467.37,2387.3 467.37,2372.75 ccw(c475.37,2372.75) 483.37,2372.75 483.37,2384.72 cw(c491.37,2384.72) 499.37,2384.72 499.37,2373.31 ccw(c507.37,2373.31) 507.37,2365.31 535.45,2365.31 ccw(c535.45,2373.31) 543.45,2373.31 543.45,2389.31 cw(c551.45,2389.31) 551.45,2397.31 585.13,2397.31 ccw(c585.13,2405.31) 590.78,2399.65 601.32,2410.19 cw(c606.99,2404.54) 612.64,2398.88 597.41,2383.65 cw(c591.76,2389.31) 591.76,2381.31 571.87,2381.31 ccw(c571.87,2373.31) 571.87,2365.31 598.39,2365.31 ccw(c598.39,2373.31) 604.04,2367.65 611.62,2375.23 cw(c617.26,2369.55) 622.93,2363.91 613.04,2354.02 610.66,2351.65 cw(c605.01,2357.31) 605.01,2349.31 455.41,2349.31 ccw(c455.41,2341.31) 455.41,2333.31 479.78,2333.31 cw(c479.78,2325.31) 487.78,2325.31 487.78,2311.08 ccw(c495.78,2311.08) 503.78,2311.08 503.78,2325.88 cw(c511.78,2325.88) 519.78,2325.88 519.78,2325.2 ccw(c527.78,2325.2) 535.78,2325.2 535.78,2325.88 cw(c543.78,2325.88) 551.78,2325.88 551.78,2314.43 ccw(c559.78,2314.43) 567.78,2314.43 567.78,2325.88 cw(c575.78,2325.88) 583.78,2325.88 583.78,2314.43 ccw(c591.78,2314.43) 599.78,2314.43 599.78,2326.47 cw(c607.78,2326.32) 615.78,2326.32 615.78,2314.43 ccw(c623.78,2314.43) 631.78,2314.43 631.78,2350.14 638.06,2356.42 ; 638.11,2356.37 cw(c643.76,2350.71) 649.42,2356.37 658.56,2347.23 ccw(c664.26,2352.85) 669.89,2358.55 649.2,2379.24 cw(c654.67,2384.71) 649.18,2390.16 653.99,2394.97 v1(653.99,2424.37)
LCD_R1: J600.32 U606.1 U606.10 U1200.N6 | length 2790.6
  SIG1 w5.5: U606.10@717.77,2313.1 752.64,2313.1 v1(753.12,2312.62) ; v1@813.16,2153.91 916.75,2050.33 1044.7,2050.33 1160.56,1934.46 1401.84,1934.46 1490.17,1846.14 2052.15,1846.14 v2(2077.19,1821.1)
  SIG1 w6: J600.32@579.29,2302.14 627.76,2302.14 638.71,2313.1 U606.1@683.32,2313.1 U606.10@717.77,2313.1 ; U1200.N6@2083.05,2385.33 v2(2098.79,2401.08)
  SIG6 w5: 2224.35,2237.43 2232.97,2228.81 2233.06,2228.81 2241.73,2220.14
  SIG6 w6: v1(753.12,2312.62) 753.12,2282.7 742,2271.57 ccw(c747.65,2265.91) 753.31,2260.26 cw(c758.97,2254.61) 764.62,2248.94 742.77,2227.08 ccw(c748.43,2221.43) 754.08,2215.77 776.13,2237.82 cw(c781.79,2232.17) 787.44,2226.5 771.11,2210.17 ccw(c776.77,2204.52) 782.42,2198.86 796.88,2213.32 cw(c802.54,2207.67) 808.19,2202 781.81,2175.61 ccw(c787.47,2169.97) 793.12,2164.3 819.56,2190.74 cw(c825.59,2184.74) 831.6,2178.71 813.16,2160.27 v1(813.16,2154.14) ; v2(2077.19,1821.1) 2222.17,1966.08 2222.17,2095.83 2241.73,2115.38 2241.73,2220.14 ; v2(2098.79,2401.08) 2114.48,2385.4 2147.93,2385.4 2182.92,2350.42 2182.92,2319.38 2224.35,2277.95 2224.35,2237.43
LCD_R2: J600.35 U606.5 U606.6 U1200.P6 | length 2788.3
  SIG1 w5.5: U606.6@717.77,2234.36 746.51,2234.36 797.76,2183.12 797.76,2081.39 878.76,2000.39 1015.32,2000.39 1137.46,1878.25 1383.49,1878.25 1446.9,1814.85 1454.86,1814.85 1472.45,1797.26 2026.31,1797.26 v2(2050.15,1821.1)
  SIG1 w6: v1(514.16,2243.09) J600.35@579.29,2243.09 ; v1@655.74,2234.36 U606.5@683.32,2234.36 U606.6@717.77,2234.36 ; U1200.P6@2114.54,2385.33 v2(2130.29,2369.59)
  SIG6 w4: 2208.99,2214.09 2223.27,2199.81
  SIG6 w6: v1@513.91,2243.34 499.01,2243.34 488.52,2232.84 488.52,2206.32 500.31,2194.53 539.98,2194.53 cw(c539.98,2186.53) 547.98,2186.53 547.98,2185.98 ccw(c555.98,2185.98) 563.98,2185.98 563.98,2210.37 cw(c571.98,2210.37) 579.98,2210.37 579.98,2185.18 ccw(c587.98,2185.18) 595.98,2185.18 595.98,2201.73 cw(c603.98,2201.73) 611.98,2201.73 611.98,2185.98 ccw(c619.98,2185.98) 627.98,2185.98 627.98,2195.34 653.99,2221.35 v1(653.99,2232.61) ; v2(2050.15,1821.1) 2208.38,1979.33 2208.38,2106.74 2223.27,2121.63 2223.27,2199.81 ; v2(2130.29,2369.59) 2141.54,2369.59 2165.68,2345.44 2165.68,2314.43 2208.99,2271.12 2208.99,2214.09
LCD_R3: J600.34 U606.4 U606.7 U1200.T6 | length 2851.1
  SIG1 w4: U1200.T6@2177.53,2385.33 2193.4,2369.46 2213.82,2369.46 2402.31,2180.97 v1@2411.74,2180.97 ; 2240.46,1996.75 v1(2269.52,2025.81)
  SIG1 w5.5: U606.7@717.77,2254.05 775.82,2254.05 779.8,2250.07 cw(c774.32,2244.59) 779.8,2239.11 774.53,2233.84 ccw(c780.03,2228.38) 785.49,2222.88 793.5,2230.89 cw(c798.99,2225.42) 804.46,2219.93 795.86,2211.33 ccw(c801.36,2205.87) 806.82,2200.37 814.61,2208.16 cw(c820.31,2202.91) 825.8,2197.43 811.67,2183.3 ccw(c817.17,2177.84) 822.63,2172.34 834.6,2184.31 cw(c840.08,2178.83) 845.56,2184.31 862.62,2167.25 cw(c857.13,2161.77) 862.61,2156.29 861.85,2155.52 ccw(c867.33,2150.04) 861.85,2144.56 ccw(c867.33,2150.04) 872.81,2144.56 876.55,2148.3 cw(c881.9,2142.7) 887.38,2137.22 880.73,2130.56 ccw(c886.23,2125.1) 891.69,2119.6 898.01,2125.92 cw(c903.49,2120.44) 908.97,2114.96 902.82,2108.81 ccw(c908.32,2103.35) 913.78,2097.85 917.42,2101.49 cw(c922.9,2096.01) 928.38,2101.49 942.09,2087.78 1068.8,2087.78 1179.95,1976.62 1418.56,1976.62 1516.93,1878.25 2121.96,1878.25 2240.46,1996.75
  SIG1 w6: v1(536.03,2262.62) J600.34@579.14,2262.62 ; v1@655.74,2254.05 U606.4@683.32,2254.05 U606.7@717.77,2254.05
  SIG3 w4.5: v1@2269.8,2025.81 2355.88,2111.9 2355.88,2128.03 2408.81,2180.97 v1@2411.74,2180.97
  SIG6 w6: v1(536.03,2262.62) 542.86,2255.79 577.86,2255.79 ccw(c577.86,2263.79) 585.86,2263.79 585.86,2272.99 cw(c593.86,2272.99) 601.86,2272.99 601.86,2251.17 ccw(c609.86,2251.17) 617.86,2251.17 617.86,2272.99 cw(c625.86,2272.99) 633.86,2272.99 633.86,2263.79 ccw(c641.86,2263.79) 641.86,2255.79 653.11,2255.79 v1(653.99,2255.79)
  other v1: 2411.74,2178.97
LCD_R4: J600.33 U606.2 U606.9 U1200.U6 | length 2973.3
  SIG1 w4: U1200.U6@2209.03,2385.33 2210.14,2384.22 2214.97,2384.22 2372.94,2226.25 2390.43,2208.76 v1(2411.74,2208.76)
  SIG1 w5.5: U606.9@717.77,2293.42 740.51,2293.42 cw(c740.51,2285.67) 748.26,2285.67 ccw(c756.01,2285.67) 763.76,2285.67 cw(c771.51,2285.67) 779.26,2285.67 779.26,2270.17 ccw(c787.01,2270.17) 794.76,2270.17 794.76,2285.67 cw(c802.51,2285.67) 802.51,2293.42 802.83,2293.42 ccw(c802.83,2301.17) 810.58,2301.17 ccw(c802.83,2301.17) 802.83,2308.92 778.8,2308.92 cw(c778.8,2316.67) 778.8,2324.42 818.78,2324.42 825.2,2330.83 848.61,2330.83 cw(c848.61,2323.08) 848.61,2315.33 832.91,2315.33 ccw(c832.91,2307.58) 832.91,2299.83 854.98,2299.83 cw(c854.98,2292.08) 854.98,2284.33 826.14,2284.33 ccw(c826.14,2276.58) 826.14,2268.83 855.88,2268.83 cw(c855.88,2261.08) 855.88,2253.33 847.2,2253.33 ccw(c847.2,2245.58) 847.2,2237.83 848.61,2237.83 cw(c848.61,2230.08) 856.36,2230.08 856.36,2211.73 955.35,2112.74 1082.3,2112.74 1087.12,2107.92 1089.06,2105.97 ccw(c1094.54,2111.45) 1100.02,2105.97 1101.36,2107.31 cw(c1106.84,2101.83) 1112.32,2107.31 cw(c1106.84,2101.83) 1112.32,2096.35 1110.66,2094.69 ccw(c1116.14,2089.21) 1110.66,2083.73 ccw(c1116.14,2089.21) 1121.62,2083.73 1123.28,2085.39 cw(c1128.76,2079.91) 1134.24,2085.39 cw(c1128.76,2079.91) 1134.24,2074.43 1132.58,2072.77 ccw(c1138.06,2067.29) 1132.58,2061.81 ccw(c1138.06,2067.29) 1143.54,2061.81 1145.2,2063.47 cw(c1150.68,2057.99) 1156.16,2063.47 cw(c1150.68,2057.99) 1156.16,2052.51 1154.5,2050.85 ccw(c1159.98,2045.37) 1154.5,2039.89 ccw(c1159.98,2045.37) 1165.46,2039.89 1167.12,2041.55 cw(c1172.6,2036.07) 1178.08,2041.55 cw(c1172.6,2036.07) 1178.08,2030.59 1176.75,2029.25 ccw(c1182.23,2023.77) 1176.75,2018.29 1190.32,2004.72 1428.3,2004.72 1532.42,1900.6 2101.37,1900.6 2245.7,2044.93 v1(2247.35,2044.93)
  SIG1 w6: J600.33@579.29,2282.46 633.14,2282.46 644.1,2293.42 U606.2@683.32,2293.42 U606.9@717.77,2293.42
  SIG3 w4.5: v1(2247.35,2044.93) 2252.96,2044.93 2257.55,2049.52 ccw(c2252.43,2054.65) 2257.55,2059.78 2251.75,2065.58 cw(c2256.78,2070.8) 2261.9,2075.93 2268.13,2069.7 ccw(c2273.26,2074.83) 2278.38,2079.96 2272.38,2085.96 cw(c2277.5,2091.09) 2282.63,2096.22 2288.31,2090.54 ccw(c2293.98,2096.2) 2299.64,2090.54 2331.17,2122.07 2331.17,2133.02 2408.91,2210.76 v1@2411.74,2210.76
LCD_R5: J600.31 U605.5 U605.6 U1200.U7 | length 2916.7
  SIG1 w4: U1200.U7@2209.03,2416.83 2209.52,2416.34 2214.28,2416.34 2215.7,2414.93 ccw(c2219.94,2419.17) 2224.18,2414.93 cw(c2228.44,2410.7) 2232.68,2414.94 cw(c2228.44,2410.7) 2232.68,2406.46 2230.27,2404.05 ccw(c2234.51,2399.81) 2238.76,2395.56 2243.42,2400.22 cw(c2247.68,2396) 2251.9,2391.74 2248.27,2388.11 ccw(c2252.53,2383.89) 2256.75,2379.62 2260.44,2383.31 cw(c2264.91,2379.3) 2269.16,2375.05 2263.71,2369.61 ccw(c2267.95,2365.36) 2263.71,2361.12 ccw(c2267.95,2365.36) 2272.2,2361.12 2273.05,2361.98 cw(c2277.3,2357.73) 2281.54,2361.98 cw(c2277.3,2357.73) 2281.54,2353.49 2280.68,2352.64 ccw(c2284.92,2348.39) 2280.68,2344.15 ccw(c2284.92,2348.39) 2289.17,2344.15 2294.43,2349.41 cw(c2298.75,2345.25) 2303,2341.01 2299.15,2337.16 ccw(c2303.41,2332.94) 2307.63,2328.67 2312.44,2333.48 cw(c2316.74,2329.3) 2320.99,2325.06 2317.52,2321.59 ccw(c2323.55,2315.56) 2317.52,2309.53 2392.87,2234.18 2421.69,2234.18 2440.05,2215.82 v1@2440.05,2210.76
  SIG1 w5.5: U605.6@717.77,2344.36 v1(812.63,2344.36) ; v1(812.63,2254.43) 812.63,2237.92 950.29,2100.26 1075.25,2100.26 1184.84,1990.67 1423.47,1990.67 1524.52,1889.62 2112.34,1889.62 v1(2237.77,2015.04)
  SIG1 w6: J600.31@579.29,2321.83 624.76,2321.83 647.3,2344.36 U605.5@683.32,2344.36 U605.6@717.77,2344.36
  SIG3 w4: v1(2237.77,2015.04) 2266.98,2044.25
  SIG3 w4.5: 2266.98,2044.25 2342.88,2120.15 2342.88,2131.72 2405.3,2194.14 2423.43,2194.14 v1@2440.05,2210.76
  SIG3 w5.5: v1@812.72,2344.27 812.72,2332.98 cw(c806.44,2332.98) 806.44,2326.69 789.38,2326.69 ccw(c789.38,2318.94) 781.63,2318.94 781.63,2290.27 ccw(c789.38,2290.27) 797.13,2290.27 797.13,2302.05 cw(c804.88,2302.05) 812.63,2302.05 812.63,2298.93 ccw(c820.38,2298.93) 828.13,2298.93 828.13,2312.31 cw(c835.88,2312.31) 843.63,2312.31 843.63,2282.84 cw(c835.88,2282.84) 835.88,2275.09 820.45,2275.09 ccw(c820.45,2267.59) 812.95,2267.59 v1@812.95,2254.75
  other v1: 2441.05,2208.76
LCD_R6: J600.30 U605.4 U605.7 U1200.E15 | length 2909.9
  SIG1 w5.5: 810.6,2426.97 810.6,2508.86 829.07,2527.33 854.86,2527.33 ; v1@952.54,2771.35 v1(953.31,2772.12)
  SIG1 w6: J600.30@579.29,2341.51 618.73,2341.51 641.26,2364.05 U605.4@683.32,2364.05 U605.7@717.77,2364.05 747.67,2364.05 755.19,2371.57 cw(c760.85,2365.91) 766.5,2371.57 773.95,2364.12 ccw(c779.62,2369.77) 785.27,2375.43 775.2,2385.5 cw(c780.87,2391.15) 786.52,2396.81 798.19,2385.13 ccw(c803.86,2390.78) 809.51,2396.44 800.44,2405.51 cw(c806.1,2411.17) 800.44,2416.82 810.6,2426.97 ; 854.86,2527.33 903.01,2575.48 ; 903.04,2575.51 cw(c908.64,2569.8) 914.3,2575.46 925.61,2564.15 ccw(c931.27,2569.8) 936.92,2564.14 950.35,2577.57 cw(c956.01,2571.92) 961.67,2577.58 967.14,2572.1 ccw(c972.8,2577.76) 978.46,2583.41 972.98,2588.89 cw(c978.64,2594.55) 972.98,2600.2 982.21,2609.43 983.24,2610.7 ccw(c976.54,2615.08) 984.43,2613.75 ccw(c976.54,2615.08) 984.54,2615.08 984.54,2648.63 cw(c992.54,2648.63) 992.54,2656.63 999.93,2656.63 ccw(c999.93,2664.63) 999.93,2672.63 987.54,2672.63 cw(c987.54,2680.63) 987.54,2688.63 1000.62,2688.63 ccw(c1000.62,2696.63) 1000.62,2704.63 987.54,2704.63 cw(c987.54,2712.63) 987.54,2720.63 1003.1,2720.63 ccw(c1003.1,2728.63) 1003.1,2736.63 992.54,2736.63 cw(c992.54,2744.63) 984.54,2744.63 984.54,2745.91 ccw(c976.54,2745.91) 984.4,2747.4 ccw(c976.54,2745.91) 984.36,2747.63 ccw(c976.54,2745.91) 976.54,2753.91 ccw(c976.54,2745.91) 968.54,2745.91 968.54,2624 cw(c955.02,2624) 964.59,2614.44 936.92,2586.77 cw(c931.27,2592.43) 925.61,2586.77 cw(c931.27,2592.43) 925.61,2598.09 948.77,2621.24 ccw(c939.61,2630.38) 952.54,2630.37 v1@952.54,2771.35 ; v2(1815.33,2684.55) U1200.E15@1831.08,2668.8
  SIG6 w4: v1(953.31,2772.12) v1@955.56,2769.87 ; 1630.49,2753.39 1715.08,2668.8 1799.58,2668.8 v2(1815.33,2684.55)
  SIG6 w5: 1445.97,2753.39 1630.49,2753.39
  SIG6 w5.5: 1427.78,2771.58 1445.97,2753.39
  SIG6 w6: v1@955.56,2769.87 959.84,2769.87 ccw(c959.84,2782.45) 972.42,2782.45 972.42,2805.8 cw(c980.17,2805.77) 987.92,2805.8 987.92,2779.83 ccw(c995.92,2779.83) 1003.92,2779.83 1003.92,2805.8 cw(c1011.92,2805.8) 1019.92,2805.8 1019.92,2779.83 ccw(c1027.92,2779.83) 1035.92,2779.83 1035.92,2805.8 cw(c1043.92,2805.8) 1051.92,2805.8 1051.92,2779.83 ccw(c1059.92,2779.83) 1067.92,2779.83 1067.92,2805.8 cw(c1075.92,2805.8) 1083.92,2805.8 1083.92,2779.83 ccw(c1091.92,2779.83) 1099.92,2779.83 1099.92,2805.8 cw(c1107.92,2805.8) 1115.92,2805.8 1115.92,2779.83 ccw(c1123.92,2779.83) 1131.92,2779.83 1131.92,2799.07 cw(c1139.92,2799.07) 1147.92,2799.07 1147.92,2779.83 ccw(c1155.92,2779.83) 1163.92,2779.83 1163.92,2805.8 cw(c1171.92,2805.8) 1179.92,2805.8 1179.92,2779.83 ccw(c1187.92,2779.83) 1195.92,2779.83 1195.92,2805.8 cw(c1203.92,2805.8) 1211.92,2805.8 1211.92,2779.83 ccw(c1219.92,2779.83) 1227.92,2779.83 1227.92,2798.18 cw(c1236.17,2798.15) 1244.42,2798.18 1244.42,2782.45 ccw(c1260.02,2782.45) 1260.02,2766.85 1389.07,2766.85 1393.8,2771.58 1427.78,2771.58